# Altium PCB PCB1.PcbDoc (part 1 of 2)
Units mm, origin at the board's own origin, x right, y up, seen from the top; angles counter-clockwise.
Board outline 193 x 120 mm, 2 copper layers (Top Layer, Bottom Layer); 109 components, 163 nets, 596 pads, 0 vias.
Unrouted connection lines stored in the file: 2.
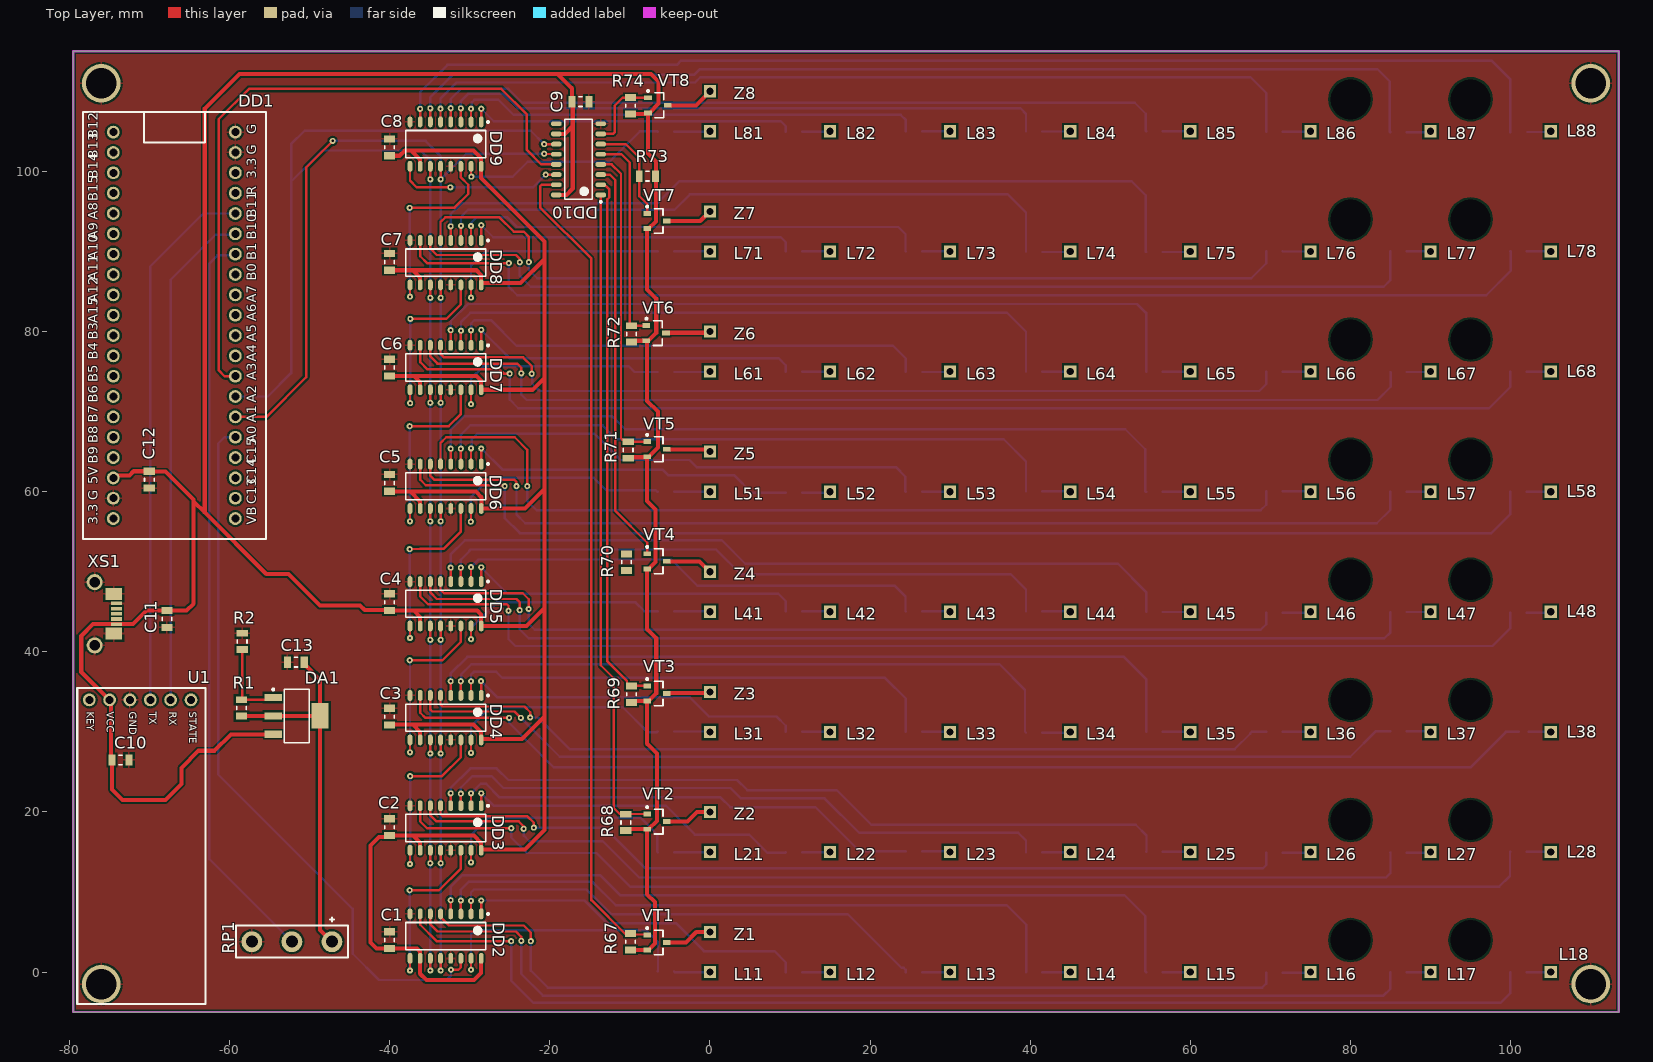
[diagram p0: Top Layer view]
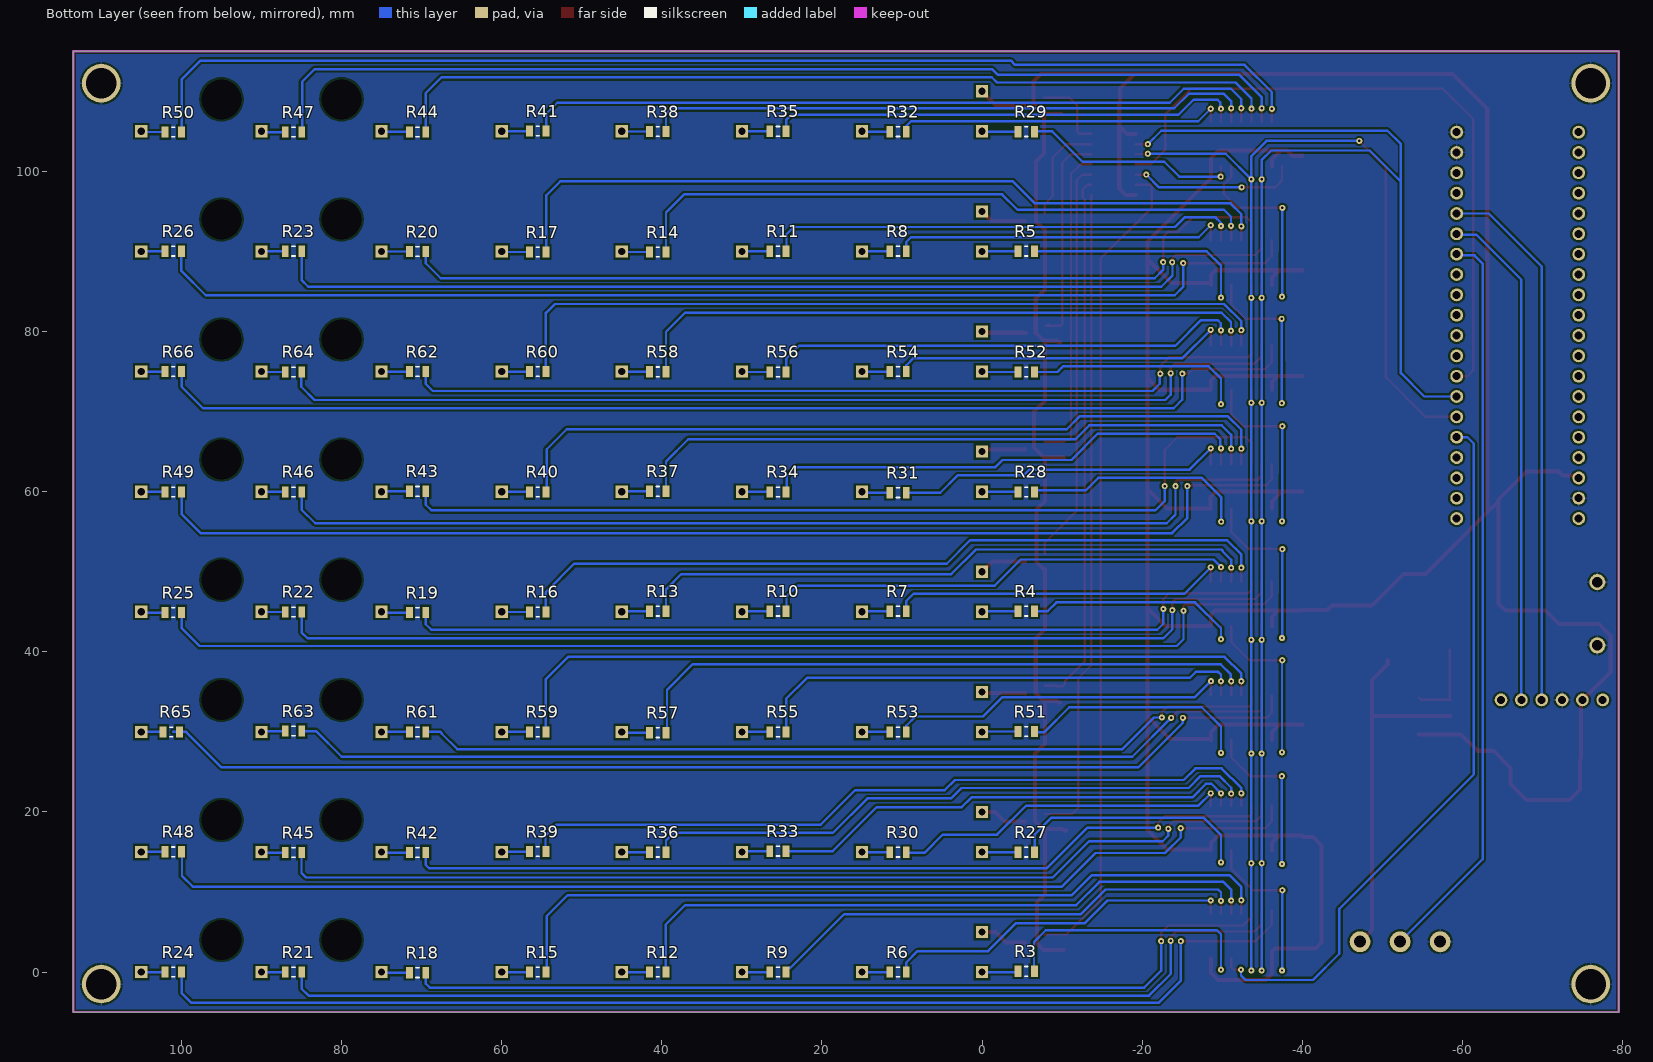
[diagram p1: Bottom Layer view, seen from below]

## Layer stack, top to bottom
Top Solder: solder mask 0.0102, Solder Resist, Dk 3.5
Top Layer: signal copper 0.0356
Dielectric 1: dielectric 0.32, FR-4, Dk 4.8
Bottom Layer: signal copper 0.0356
Bottom Solder: solder mask 0.0102, Solder Resist, Dk 3.5

## Board outline
-79.5,-5 113.5,-5 113.5,115 -79.5,115
cut-out: 113.5,114 113.5,-5 113.5,114

## Design rules (kind name [scope] priority, off if disabled: settings)
Clearance [All] p1: gap=0.254 ignorepadtopadclearanceinfootprint=TRUE
PolygonConnect [All] p1: connectstyle=Relief reliefconductorwidth=0.254 reliefentries=4 polygonreliefangle="90 Angle" airgapwidth=0.254
RoutingVias [All] p1: holewidth=0.8 width=1.27 viastyle="Through Hole" minholewidth=0.8 minwidth=1.27 maxholewidth=0.8 maxwidth=1.27
SolderMaskExpansion [All] p1: expansion=0.102 istentingtop=FALSE
Width Width_1 [InNetClass('allother')] p1: maxlimit=0.3 minlimit=0.3 preferedwidth=0.3
Width [InNetClass('VCC')] p2: maxlimit=0.51 minlimit=0.51 preferedwidth=0.51
30 further rules are at their usual default settings.

## Classes and differential pairs
component class Sheet2: R3 R4 R5 R6 R7 R8 R9 R10 R11 R12 R13 R14 R15 R16 R17 R18 R19 R20 R21 R22 R23 R24 R25 R26 R27 R28 R29 R30 R31 R32 R33 R34 R35 R36 R37 R38 R39 R40 R41 R42 R43 R44 R45 R46 R47 R48 R49 R50 R51 R52 R53 R54 R55 R56 R57 R58 R59 R60 R61 R62 R63 R64 R65 R66
net class allother: NetDA1_3 NetDD1_5 NetDD1_6 NetDD1_7 NetDD1_8 NetDD1_14 NetDD1_15 NetDD1_16 NetDD2_1 NetDD2_2 NetDD2_3 NetDD2_4 NetDD2_5 NetDD2_6 NetDD2_7 NetDD2_9 NetDD2_15 NetDD3_1 NetDD3_2 NetDD3_3 NetDD3_4 NetDD3_5 NetDD3_6 NetDD3_7 NetDD3_9 NetDD3_15 NetDD4_1 NetDD4_2 NetDD4_3 NetDD4_4 NetDD4_5 NetDD4_6 NetDD4_7 NetDD4_9 NetDD4_15 NetDD5_1 NetDD5_2 NetDD5_3 NetDD5_4 NetDD5_5 NetDD5_6 NetDD5_7 NetDD5_9 NetDD5_15 NetDD6_1 NetDD6_2 NetDD6_3 NetDD6_4 NetDD6_5 NetDD6_6 NetDD6_7 NetDD6_9 NetDD6_15 NetDD7_1 NetDD7_2 NetDD7_3 NetDD7_4 NetDD7_5 NetDD7_6 NetDD7_7 NetDD7_9 NetDD7_15 NetDD8_1 NetDD8_2 NetDD8_3 NetDD8_4 NetDD8_5 NetDD8_6 NetDD8_7 NetDD8_9 NetDD8_15 NetDD9_1 NetDD9_2 NetDD9_3 NetDD9_4 NetDD9_5 NetDD9_6 NetDD9_7 NetDD9_9 NetDD9_15 NetDD10_1 NetDD10_2 NetDD10_3 NetDD10_4 NetDD10_5 NetDD10_6 NetDD10_7 NetDD10_15 NetR3_2 NetR4_2 NetR5_2 NetR6_2 NetR7_2 NetR8_2 NetR9_2 NetR10_2 NetR11_2 NetR12_2 NetR13_2 NetR14_2 NetR15_2 NetR16_2 NetR17_2 NetR18_2 NetR19_2 NetR20_2 NetR21_2 NetR22_2 NetR23_2 NetR24_2 NetR25_2 NetR26_2 NetR27_2 NetR28_2 NetR29_2 NetR30_2 NetR31_2 NetR32_2 NetR33_2 NetR34_2 NetR35_2 NetR36_2 NetR37_2 NetR38_2 NetR39_2 NetR40_2 NetR41_2 NetR42_2 NetR43_2 NetR44_2 NetR45_2 NetR46_2 NetR47_2 NetR48_2 NetR49_2 NetR50_2 NetR51_2 NetR52_2 NetR53_2 NetR54_2 NetR55_2 NetR56_2 NetR57_2 NetR58_2 NetR59_2 NetR60_2 NetR61_2 NetR62_2 NetR63_2 NetR64_2 NetR65_2 NetR66_2
net class VCC: +3,3V +5 GND NetVT1_3 NetVT2_3 NetVT3_3 NetVT4_3 NetVT5_3 NetVT6_3 NetVT7_3 NetVT8_3
component class Sheet1: C1 C2 C3 C4 C5 C6 C7 C8 C9 C10 C11 C12 C13 DA1 DD1 DD2 DD3 DD4 DD5 DD6 DD7 DD8 DD9 DD10 R1 R2 R67 R68 R69 R70 R71 R72 R73 R74 RP1 U1 VT1 VT2 VT3 VT4 VT5 VT6 VT7 VT8 XS1

## Components (designator, comment, footprint, x,y, rotation, side; value= is the part's Value field where it differs from the comment)
C1 "0.1uF" CAPC2112X13N -40,4 r270 top
C2 "0.1uF" CAPC2112X13N -40,18.1 r270 top
C3 "0.1uF" CAPC2112X13N -40,31.9 r270 top
C4 "0.1uF" CAPC2112X13N -40,46.2 r270 top
C5 "0.1uF" CAPC2112X13N -40,61.1 r270 top
C6 "0.1uF" CAPC2112X13N -40,75.5 r270 top
C7 "0.1uF" CAPC2112X13N -40,88.7 r270 top
C8 "0.1uF" CAPC2112X13N -40,103 r270 top
C9 "0.1uF" CAPC2112X13N -16.15,108.7 r180 top
C10 "0.1uF" CAPC2112X13N -73.6,26.5 r180 top
C11 "0.1uF" CAPC2112X13N -67.8,44.1 r90 top
C12 "0.1uF" CAPC2112X13N -70,61.5 r90 top
C13 "1u.F" CAPC2112X13N -51.7,38.7 r0 top
DA1 "LM317" SOT230P700X180-4N -51.6,32 r0 top
DD1 "STM32F103C8T6" STM32F103 -59.26,56.64 r90 top
DD2 "74HC595" SOIC127P600X175-16N -33,4.5 r270 top
DD3 "74HC595" SOIC127P600X175-16N -33,18 r270 top
DD4 "74HC595" SOIC127P600X175-16N -33,31.775 r270 top
DD5 "74HC595" SOIC127P600X175-16N -33,46 r270 top
DD6 "74HC595" SOIC127P600X175-16N -33,60.675 r270 top
DD7 "74HC595" SOIC127P600X175-16N -33,75.5 r270 top
DD8 "74HC595" SOIC127P600X175-16N -33,88.6 r270 top
DD9 "74HC595" SOIC127P600X175-16N -33,103.4 r270 top
DD10 "74HC595" SOIC127P600X175-16N -16.4,101.5 r180 top
R1 "240Ом" RESC2113X06N -58.5,33 r90 top
R2 "390 Ом" RESC2113X06N -58.4,41.3 r270 top
R3 "Резистор 0805" RESC2113X06N -5.5,0.1 r0 bottom
R4 "Резистор 0805" RESC2113X06N -5.5,45.075 r0 bottom
R5 "Резистор 0805" RESC2113X06N -5.5,90.025 r0 bottom
R6 "Резистор 0805" RESC2113X06N 10.5,0 r0 bottom
R7 "Резистор 0805" RESC2113X06N 10.5,45.075 r0 bottom
R8 "Резистор 0805" RESC2113X06N 10.5,90.025 r0 bottom
R9 "Резистор 0805" RESC2113X06N 25.5,0 r0 bottom
R10 "Резистор 0805" RESC2113X06N 25.5,45.075 r0 bottom
R11 "Резистор 0805" RESC2113X06N 25.5,90.025 r0 bottom
R12 "Резистор 0805" RESC2113X06N 40.5,0 r0 bottom
R13 "Резистор 0805" RESC2113X06N 40.5,45.075 r0 bottom
R14 "Резистор 0805" RESC2113X06N 40.5,89.925 r0 bottom
R15 "Резистор 0805" RESC2113X06N 55.5,0 r0 bottom
R16 "Резистор 0805" RESC2113X06N 55.5,44.975 r0 bottom
R17 "Резистор 0805" RESC2113X06N 55.5,89.925 r0 bottom
R18 "Резистор 0805" RESC2113X06N 70.5,-0.075 r0 bottom
R19 "Резистор 0805" RESC2113X06N 70.5,44.9 r0 bottom
R20 "Резистор 0805" RESC2113X06N 70.5,90 r0 bottom
R21 "Резистор 0805" RESC2113X06N 86,0 r0 bottom
R22 "Резистор 0805" RESC2113X06N 86,44.975 r0 bottom
R23 "Резистор 0805" RESC2113X06N 86,90.025 r0 bottom
R24 "Резистор 0805" RESC2113X06N 101,0 r0 bottom
R25 "Резистор 0805" RESC2113X06N 101,44.9 r0 bottom
R26 "Резистор 0805" RESC2113X06N 101,90.025 r0 bottom
R27 "Резистор 0805" RESC2113X06N -5.5,14.975 r0 bottom
R28 "Резистор 0805" RESC2113X06N -5.5,59.975 r0 bottom
R29 "Резистор 0805" RESC2113X06N -5.5,104.95 r0 bottom
R30 "Резистор 0805" RESC2113X06N 10.5,14.975 r0 bottom
R31 "Резистор 0805" RESC2113X06N 10.5,59.875 r0 bottom
R32 "Резистор 0805" RESC2113X06N 10.5,104.95 r0 bottom
R33 "Резистор 0805" RESC2113X06N 25.5,15.1 r0 bottom
R34 "Резистор 0805" RESC2113X06N 25.5,59.975 r0 bottom
R35 "Резистор 0805" RESC2113X06N 25.5,105 r0 bottom
R36 "Резистор 0805" RESC2113X06N 40.5,14.975 r0 bottom
R37 "Резистор 0805" RESC2113X06N 40.5,60.05 r0 bottom
R38 "Резистор 0805" RESC2113X06N 40.5,104.975 r0 bottom
R39 "Резистор 0805" RESC2113X06N 55.5,15.05 r0 bottom
R40 "Резистор 0805" RESC2113X06N 55.5,59.975 r0 bottom
R41 "Резистор 0805" RESC2113X06N 55.5,105.025 r0 bottom
R42 "Резистор 0805" RESC2113X06N 70.5,14.925 r0 bottom
R43 "Резистор 0805" RESC2113X06N 70.5,60.05 r0 bottom
R44 "Резистор 0805" RESC2113X06N 70.5,104.925 r0 bottom
R45 "Резистор 0805" RESC2113X06N 86,14.925 r0 bottom
R46 "Резистор 0805" RESC2113X06N 86,59.975 r0 bottom
R47 "Резистор 0805" RESC2113X06N 86,104.9 r0 bottom
R48 "Резистор 0805" RESC2113X06N 101,15.025 r0 bottom
R49 "Резистор 0805" RESC2113X06N 101,59.975 r0 bottom
R50 "Резистор 0805" RESC2113X06N 101,104.9 r0 bottom
R51 "Резистор 0805" RESC2113X06N -5.5,30.05 r0 bottom
R52 "Резистор 0805" RESC2113X06N -5.5,74.95 r0 bottom
R53 "Резистор 0805" RESC2113X06N 10.5,30 r0 bottom
R54 "Резистор 0805" RESC2113X06N 10.5,75 r0 bottom
R55 "Резистор 0805" RESC2113X06N 25.5,30 r0 bottom
R56 "Резистор 0805" RESC2113X06N 25.5,74.95 r0 bottom
R57 "Резистор 0805" RESC2113X06N 40.5,29.9 r0 bottom
R58 "Резистор 0805" RESC2113X06N 40.5,74.975 r0 bottom
R59 "Резистор 0805" RESC2113X06N 55.5,30 r0 bottom
R60 "Резистор 0805" RESC2113X06N 55.5,75 r0 bottom
R61 "Резистор 0805" RESC2113X06N 70.5,30 r0 bottom
R62 "Резистор 0805" RESC2113X06N 70.5,75 r0 bottom
R63 "Резистор 0805" RESC2113X06N 86,30.1 r0 bottom
R64 "Резистор 0805" RESC2113X06N 86,74.95 r0 bottom
R65 "Резистор 0805" RESC2113X06N 101.25,30 r0 bottom
R66 "Резистор 0805" RESC2113X06N 101,75 r0 bottom
R67 "10k" RESC2113X06N -9.9,3.8 r90 top
R68 "10k" RESC2113X06N -10.5,18.7 r90 top
R69 "10k" RESC2113X06N -9.8,34.7 r90 top
R70 "10k" RESC2113X06N -10.4,51.2 r90 top
R71 "10k" RESC2113X06N -10.2,65.2 r90 top
R72 "10k" RESC2113X06N -9.8,79.7 r90 top
R73 "10k" RESC2113X06N -7.8,99.4 r180 top
R74 "10k" RESC2113X06N -9.9,108.2 r90 top
RP1 "Potent" POTENT1 -57.2,3.8 r0 top
U1 "HC-05" HC-05 -77.5,34 r270 top
VT1 "P-channel" SOT95P245X120-3N -6.6,3.7 r0 top
VT2 "P-channel" SOT95P245X120-3N -6.6,18.8 r0 top
VT3 "P-channel" SOT95P245X120-3N -6.6,34.8 r0 top
VT4 "P-channel" SOT95P245X120-3N -6.6,51.3 r0 top
VT5 "P-channel" SOT95P245X120-3N -6.6,65.3 r0 top
VT6 "P-channel" SOT95P245X120-3N -6.7,79.8 r0 top
VT7 "P-channel" SOT95P245X120-3N -6.6,93.8 r0 top
VT8 "P-channel" SOT95P245X120-3N -6.5,108.25 r0 top
XS1 "USB" USB -76.825,40.8 r0 top

## Footprints (in the part's own frame and the unit in brackets; to place one, negate y for a bottom-side part, rotate by r counter-clockwise, add the part's x,y. Pads: shape width x height; smd on the part's side, far side on the other; paste and mask are expansions set on the pad)
CAPC2112X13N [mm] "Chip Capacitor, 2-Leads, Body 2,10x1,25mm, IPC Medium Density"
  rect 0.9x1.4 smd: 1(-1.05,0) 2(1.05,0)
  silkscreen extent -0.2,-0.6 0.2,0.6, body extent -1.1,-0.63 1.1,0.63, height 1.3
HC-05 [mm]
  round 1.6 hole 1: 1(0,12.7) 2(0,10.16) 3(0,7.62) 4(0,5.08) 5(0,2.54) 6(0,0)
  silkscreen extent -1.5,-1.5 38,14.5
POTENT1 [mm]
  round 2.6 hole 1.5: 1(0,0) 2(5,0) 3(10,0)
  silkscreen extent -2,-2 12,3
RESC2113X06N [mm] "Chip Resistor, 2-Leads, Body 2,10x1,30mm, IPC Medium Density"
  rect 0.85x1.4 smd: 1(-1.025,0) 2(1.025,0)
  silkscreen extent -0.2,-0.6 0.2,0.6, body extent -1.1,-0.7 1.1,0.7, height 0.55
SOIC127P600X175-16N [mm] "SOIC, 16-Leads, Body 9,90x4,00mm, Pitch 1,27mm, IPC Medium Density"
  oval 1.35x0.6 smd: 1(-2.775,4.445) 2(-2.775,3.175) 3(-2.775,1.905) 4(-2.775,0.635) 5(-2.775,-0.635) 6(-2.775,-1.905) 7(-2.775,-3.175) 8(-2.775,-4.445) 9(2.775,-4.445) 10(2.775,-3.175) 11(2.775,-1.905) 12(2.775,-0.635) 13(2.775,0.635) 14(2.775,1.905) 15(2.775,3.175) 16(2.775,4.445)
  silkscreen extent -2.9,-5 1.7,5.42, body extent -2.96,-5 2.96,5, height 1.75
SOT95P245X120-3N [mm] "SOT23, 3-Leads, Body 2,92x2,45mm, Pitch 0,95mm, IPC Medium Density"
  rect 0.95x0.6 smd: 1(-1.225,0.95) 2(-1.225,-0.95) 3(1.225,0)
  silkscreen extent -1.35,-1.55 0.75,1.92, body extent -0.75,-1.56 0.75,1.56, height 1.2
SOT230P700X180-4N [mm] "SOT223, 4-Leads, Body 6,50x7,00mm (avg), Pitch 2,30mm, IPC Medium Density"
  rect 2.15x0.9 smd: 1(-2.925,-2.3) 2(-2.925,0) 3(-2.925,2.3)
  rect 2.15x3.2 smd: 2(2.925,0)
  silkscreen extent -3.05,-3.35 1.55,3.42, body extent -3.5,-3.35 3.5,3.35, height 1.8
STM32F103 [mm]
  round 1.6 hole 1: 1(0,0) 2(2.54,0) 3(5.08,0) 4(7.62,0) 5(10.16,0) 6(12.7,0) 7(15.24,0) 8(17.78,0) 9(20.32,0) 10(22.86,0) 11(25.4,0) 12(27.94,0) 13(30.48,0) 14(33.02,0) 15(35.56,0) 16(38.1,0) 17(40.64,0) 18(43.18,0) 19(45.72,0) 20(48.26,0) 21(0,15.24) 22(2.54,15.24) 23(5.08,15.24) 24(7.62,15.24) 25(10.16,15.24) 26(12.7,15.24) 27(15.24,15.24) 28(17.78,15.24) 29(20.32,15.24) 30(22.86,15.24) 31(25.4,15.24) 32(27.94,15.24) 33(30.48,15.24) 34(33.02,15.24) 35(35.56,15.24) 36(38.1,15.24) 37(40.64,15.24) 38(43.18,15.24) 39(45.72,15.24) 40(48.26,15.24)
  silkscreen extent -2.54,-3.81 50.8,19.05
USB [mm]
  rect 1.38x0.45 smd: 1(2.725,2.65) 2(2.725,3.3) 3(2.725,3.95) 4(2.725,4.6) 5(2.725,5.25)
  round 2 hole 1.3 unplated: 5(0,0) 5(0,7.9)
  rect 2.1x1.475 smd: 5(2.375,1.475) 5(2.375,6.425)

## Part data
DA1: "Регулируемый стабилизатор напряжения"
DD2 DD3 DD4 DD5 DD6 DD7 DD8 DD9 DD10: "Сдвиговый регистр"
R67 R68 R69 R70 R71 R72 R73 R74: library part "Резистор 0805"
RP1: "Переменный резистор 10кОм"
VT1 VT2 VT3 VT4 VT5 VT6 VT7 VT8: "Транзистор MOSFET N-канальный"

## Free pads (board coordinates)
  rect 1.524x1.524 hole 0.9: 1(0,0) 2(15,0) 3(30,0) 4(45,0) 5(60,0) 6(75,0) 7(90,0) 8(105,0) 9(0,15) 10(15,15) 11(30,15) 12(45,15) 13(60,15) 14(75,15) 15(90,15) 16(105,15) 17(0,30) 18(15,30) 19(30,30) 20(45,30) 21(60,30) 22(75,30) 23(90,30) 24(105,30) 25(0,45) 26(15,45) 27(30,45) 28(45,45) 29(60,45) 30(75,45) 31(90,45) 32(105,45) 33(0,60) 34(15,60) 35(30,60) 36(45,60) 37(60,60) 38(75,60) 39(90,60) 40(105,60) 41(0,75) 42(15,75) 43(30,75) 44(45,75) 45(60,75) 46(75,75) 47(90,75) 48(105,75) 49(0,90) 50(15,90) 51(30,90) 52(45,90) 53(60,90) 54(75,89.975) 55(90,90) 56(105,90) 57(0,105) 58(15,105) 59(30,105) 60(45,105) 61(60,105) 62(75,105) 63(90,105) 64(105,105) 65(0,5) 66(0,20) 67(0,35) 68(0,50) 69(0,65) 70(0,80) 71(0,95) 72(0,110)
  round 4.8 hole 3.8: 94(-76,-1.5)
  round 4.8 hole 3.8 unplated: 94(-76,111) 94(110,-1.5) 94(110,111)
  round 0.762 hole 0.3: 95(-47.1,103.8) 95(-37.5,10.225) 95(-37.5,52.825) 95(-37.5,68.175) 95(-37.5,95.45) 95(-37.475,38.95) 95(-37.45,0.2) 95(-37.45,13.5) 95(-37.45,41.725) 95(-37.45,56.3) 95(-37.445,27.45) 95(-37.445,84.355) 95(-37.425,24.475) 95(-37.425,71.05) 95(-37.4,81.575) 95(-36.175,107.8) 95(-34.905,107.87) 95(-34.9,0.2) 95(-34.9,13.6) 95(-34.9,27.3) 95(-34.9,41.5) 95(-34.9,56.3) 95(-34.9,71.1) 95(-34.9,84.2) 95(-34.9,99) 95(-33.635,107.84) 95(-33.625,0.2) 95(-33.625,13.6) 95(-33.625,27.3) 95(-33.625,41.5) 95(-33.625,56.3) 95(-33.625,71.1) 95(-33.625,84.2) 95(-33.625,99) 95(-32.4,98) 95(-32.375,8.975) 95(-32.375,22.325) 95(-32.375,36.325) 95(-32.375,65.375) 95(-32.365,50.515) 95(-32.365,80.175) 95(-32.365,93.135) 95(-32.365,107.885) 95(-32.325,0.3) 95(-31.1,22.3) 95(-31.1,36.325) 95(-31.095,8.945) 95(-31.095,50.505) 95(-31.095,65.37) 95(-31.095,107.87) 95(-31.075,80.1) 95(-31.075,93.2) 95(-29.85,56.25) 95(-29.825,0.3) 95(-29.825,8.9) 95(-29.825,13.7) 95(-29.825,22.325) 95(-29.825,27.375) 95(-29.825,36.325) 95(-29.825,41.575) 95(-29.825,50.575) 95(-29.825,65.4) 95(-29.825,70.925) 95(-29.825,80.15) 95(-29.825,84.225) 95(-29.825,93.175) 95(-29.825,107.825) 95(-29.787,99.338) 95(-28.585,36.347) 95(-28.555,8.945) 95(-28.555,65.395) 95(-28.552,107.822) 95(-28.55,22.325) 95(-28.55,50.55) 95(-28.55,80.2) 95(-28.55,93.275) 95(-25.625,60.7) 95(-25.15,45.125) 95(-25.1,88.55) 95(-25.075,31.75) 95(-25,74.75) 95(-24.825,3.875) 95(-24.8,17.975) 95(-24.15,60.7) 95(-23.75,45.2) 95(-23.725,88.65) 95(-23.6,31.75) 95(-23.55,3.9) 95(-23.55,74.775) 95(-23.25,17.9) 95(-22.8,60.7) 95(-22.625,45.35) 95(-22.6,88.675) 95(-22.45,31.8) 95(-22.35,3.875) 95(-22.25,74.725) 95(-21.975,18.05) 95(-20.7,102.2) 95(-20.7,103.4) 95(-20.5,99.6)
  round 0 hole 5 unplated: 97(80,4) 97(80,19) 97(80,34) 97(80,49) 97(80,64) 97(80,79) 97(80,94) 97(80,109) 97(95,4) 97(95,19) 97(95,34) 97(95,49) 97(95,64) 97(95,79) 97(95,94) 97(95,109)

## Nets (pads, with @x,y where several pads share a name; then routed paths per layer and width w, separated by ;. In a path a pad name is that pad's centre, name@x,y a point inside that pad or via, vN(x,y) a via of type N, cw(c..) or ccw(c..) an arc to the next point about the centre after c; other vN are vias at no path point)
+3,3V: C13.2 DA1.2 R1.1 RP1.3 | length 46.4
  Top Layer w0.51: R1.1@-58.5,31.975 -58.488,31.988 -54.538,31.988 DA1.2@-54.525,32 DA1.2@-48.675,32 ; C13.2@-50.65,38.95 C13.2@-50.65,38.7 -50.65,38.45 -48.675,36.475 DA1.2@-48.675,32 ; RP1.3@-47.2,3.8 -48.675,5.275 DA1.2@-48.675,32
+5: C1.2 C2.2 C3.2 C4.2 C5.2 C6.2 C7.2 C8.2 C9.2 C10.2 C11.2 C12.2 DA1.1 DD1.23 DD2.10 DD2.16 DD3.10 DD3.16 DD4.10 DD4.16 DD5.10 DD5.16 DD6.10 DD6.16 DD7.10 DD7.16 DD8.10 DD8.16 DD9.10 DD9.16 DD10.10 DD10.16 R67.1 R68.1 R69.1 R70.1 R71.1 R72.1 R73.1 R74.1 U1.5 VT1.2 VT2.2 VT3.2 VT4.2 VT5.2 VT6.2 VT7.2 VT8.2 XS1.1 | length 657.1
  Top Layer w0.51: DD1.23@-74.54,62.2 -74.34,62 -72.5,62 -71.95,62.55 C12.2@-70,62.55 -69.95,62.5 -68,62.5 -64.5,59 -64.5,58.8 ; DA1.1@-54.525,29.7 -59.8,29.7 -61.85,27.65 -63.85,27.65 -66,25.5 -66,23.5 -68,21.5 -73.351,21.5 -74.65,22.799 C10.2@-74.65,26.5 -74.805,26.655 -74.805,33.845 U1.5@-74.96,34 -75,34 -78.5,37.5 -78.5,42 -77.05,43.45 XS1.1@-74.1,43.45 -72.05,43.45 -70.35,45.15 C11.2@-67.8,45.15 -65.35,45.15 -64.5,46 -64.5,58.8 ; C3.2@-40,30.85 -39.95,30.9 -37.1,30.9 ; C5.2@-40,60 -37.4,60 ; C6.2@-40,74.45 -36.95,74.45 ; C7.2@-40,87.65 -37.05,87.65 ; C8.2@-40,101.95 -38.75,101.95 -38.1,102.6 -37.3,102.6 ; DD3.10@-36.175,15.225 -36.175,16.175 -37.05,17.05 ; DD4.10@-36.175,29 -36.175,29.975 -37.1,30.9 ; DD5.10@-36.175,43.225 -36.175,44.375 -36.95,45.15 ; DD6.10@-36.175,57.9 -36.175,58.775 -37.4,60 ; DD7.10@-36.175,72.725 -36.175,73.675 -36.95,74.45 ; DD8.10@-36.175,85.825 -36.175,86.775 -37.05,87.65 ; DD9.10@-36.175,100.625 -36.192,100.642 -36.192,101.492 -37.3,102.6 ; DD2.16@-28.555,1.725 -28.555,-0.105 -29.45,-1 -35.4,-1 -36.2,-0.2 -36.2,0.3 -36.175,0.325 DD2.10@-36.175,1.725 -36.175,2.575 -36.55,2.95 C1.2@-40,2.95 -41.65,2.95 -42.4,3.7 -42.4,15.8 -41.3,16.9 -40.15,16.9 C2.2@-40,17.05 -37.05,17.05 ; DD8.16@-28.555,85.825 DD8.16@-28.555,86.008 ; DD10.16@-19.175,97.055 -19.17,97.05 -17.925,97.05 -17.125,97.85 -17.125,105.675 ; DD10.10@-19.175,104.675 -19.158,104.692 -18.108,104.692 -17.125,105.675 ; R68.1@-10.5,17.675 -10.225,17.675 -10.05,17.85 VT2.2@-7.825,17.85 ; R71.1@-10.2,64.175 -10.075,64.3 -8.05,64.3 -8.045,64.305 -7.87,64.305 VT5.2@-7.825,64.35 ; R67.1@-10.175,2.775 R67.1@-9.9,2.775 -9.888,2.763 -7.837,2.763 VT1.2@-7.825,2.75 -7.65,2.75 -6.841,3.559 -6.841,8.741 -7.825,9.725 VT2.2@-7.825,17.85 ; R74.1@-9.9,107.175 -8.025,107.175 -7.9,107.3 VT8.2@-7.725,107.3 ; R69.1@-9.8,33.675 -9.525,33.675 -9.35,33.85 VT3.2@-7.825,33.85 ; R72.1@-9.8,78.675 -9.525,78.675 -9.35,78.85 VT6.2@-7.925,78.85 ; -64.5,58.8 -63.075,57.375 ; -63.075,57.375 -55.4,49.7 -52.597,49.7 -48.675,45.778 -43.678,45.778 -43.1,45.2 -40.05,45.2 C4.2@-40,45.15 -36.95,45.15 ; -63.075,57.375 -63.075,107.825 -58.725,112.175 -19,112.175 ; -37.4,60 -29.2,60 -28.5,59.3 -28.538,59.262 -28.538,57.917 DD6.16@-28.555,57.9 -23.1,57.9 -20.65,60.35 ; -37.3,102.6 -29.5,102.6 -28.555,101.655 DD9.16@-28.555,100.625 -28.555,99.155 -20.65,91.25 -20.65,89.025 ; -37.1,30.9 -29.5,30.9 -28.572,29.972 -28.572,29.017 DD4.16@-28.555,29 -28.555,29.058 -28.513,29.1 -23.45,29.1 -20.65,31.9 ; -37.05,17.05 -29.45,17.05 -28.555,16.155 -28.555,15.258 -28.513,15.3 -23.1,15.3 -20.65,17.75 -20.65,31.9 ; -37.05,87.65 -29.15,87.65 -28.555,87.055 DD8.16@-28.555,86.008 ; -36.95,45.15 -29.05,45.15 -28.555,44.655 DD5.16@-28.555,43.225 -22.875,43.225 -20.65,45.45 ; -36.95,74.45 -29.15,74.45 -28.572,73.872 -28.572,72.742 DD7.16@-28.555,72.725 -22.125,72.725 -20.65,74.2 ; DD8.16@-28.555,86.008 -28.513,86.05 -23.625,86.05 -20.65,89.025 ; -20.65,31.9 -20.65,45.45 ; -20.65,45.45 -20.65,47.775 -20.65,60.35 ; -20.65,60.35 -20.65,74.2 ; -20.65,74.2 -20.65,85.35 -20.65,89.025 ; -19,112.175 -7.375,112.175 -6.4,111.2 -6.4,108.45 -7.55,107.3 VT8.2@-7.725,107.3 ; -19,112.175 -17.2,110.375 C9.2@-17.2,108.7 -17.125,108.625 -17.125,105.675 ; VT2.2@-7.825,17.85 -7.65,17.85 -6.6,18.9 -6.6,27.3 -7.825,28.525 VT3.2@-7.825,33.85 ; VT3.2@-7.825,33.85 -7.65,33.85 -6.7,34.8 -6.7,41.7 -7.825,42.825 VT4.2@-7.825,50.35 -7.65,50.35 -6.8,51.2 -6.8,57.8 -7.825,58.825 VT5.2@-7.825,64.35 ; VT5.2@-7.825,64.35 -7.65,64.35 -6.5,65.5 -6.5,70 -7.825,71.325 -7.825,78.85 -7.65,78.85 -6.7,79.8 -6.7,84.1 -7.825,85.225 VT7.2@-7.825,92.85 -7.65,92.85 -6.75,93.75 -6.75,101.25 -7.725,102.225 VT8.2@-7.725,107.3
GND: C1.1 C2.1 C3.1 C4.1 C5.1 C6.1 C7.1 C8.1 C9.1 C10.1 C11.1 C12.1 C13.1 DD1.19 DD1.20 DD1.22 DD2.8 DD2.13 DD3.8 DD3.13 DD4.8 DD4.13 DD5.8 DD5.13 DD6.8 DD6.13 DD7.8 DD7.13 DD8.8 DD8.13 DD9.8 DD9.13 DD10.8 pad.94 R2.1 RP1.1 U1.4 XS1.5
NetDA1_3: DA1.3 R1.2 R2.2 | length 10.4
  Top Layer w0.3: R2.2@-58.4,40.275 -58.4,34.125 R1.2@-58.5,34.025 -54.8,34.025 DA1.3@-54.525,34.3
NetDD1_5: DD1.5 DD2.14 pad.95@-32.325,0.3 | length 90.2
  Top Layer w0.3: pad.95@-32.325,0.3 -31.4,0.3 -31.097,0.603 -31.097,1.722 DD2.14@-31.095,1.725
  Bottom Layer w0.3: DD1.5@-59.26,66.8 -60.6,66.8 -61.4,66 -61.4,24.7 -44.6,7.9 -44.6,2.3 -41.325,-0.975 -32.9,-0.975 -32.325,-0.4 pad.95@-32.325,0.3
NetDD1_6: DD1.6 DD2.12 DD3.12 DD4.12 DD5.12 DD6.12 DD7.12 DD8.12 DD9.12 DD10.12 pad.95@-20.7,102.2 pad.95@-33.625,0.2 pad.95@-33.625,13.6 pad.95@-33.625,27.3 pad.95@-33.625,41.5 pad.95@-33.625,56.3 pad.95@-33.625,71.1 pad.95@-33.625,84.2 pad.95@-33.625,99 pad.95@-47.1,103.8 | length 186.6
  Top Layer w0.3: DD1.6@-59.26,69.34 -55.36,69.34 -50.4,74.3 -50.4,100.5 pad.95@-47.1,103.8 ; DD2.12@-33.635,1.725 -33.63,1.72 -33.63,0.205 pad.95@-33.625,0.2 ; DD3.12@-33.635,15.225 -33.63,15.22 -33.63,13.605 pad.95@-33.625,13.6 ; DD4.12@-33.635,29 -33.63,28.995 -33.63,27.305 pad.95@-33.625,27.3 ; DD5.12@-33.635,43.225 -33.63,43.22 -33.63,41.505 pad.95@-33.625,41.5 ; DD6.12@-33.635,57.9 -33.63,57.895 -33.63,56.305 pad.95@-33.625,56.3 ; DD7.12@-33.635,72.725 -33.63,72.72 -33.63,71.105 pad.95@-33.625,71.1 ; DD8.12@-33.635,85.825 -33.63,85.82 -33.63,84.205 pad.95@-33.625,84.2 ; DD9.12@-33.635,100.625 -33.63,100.62 -33.63,99.005 pad.95@-33.625,99 ; pad.95@-20.7,102.2 -20.668,102.167 -19.207,102.167 DD10.12@-19.175,102.135
  Bottom Layer w0.3: pad.95@-47.1,103.8 -35.5,103.8 -33.625,101.925 pad.95@-33.625,99 ; pad.95@-33.625,0.2 pad.95@-33.625,13.6 pad.95@-33.625,27.3 pad.95@-33.625,41.5 pad.95@-33.625,56.3 pad.95@-33.625,71.1 pad.95@-33.625,84.2 pad.95@-33.625,99 ; pad.95@-20.7,102.2 -30.425,102.2 pad.95@-33.625,99
NetDD1_7: DD1.7 DD2.11 DD3.11 DD4.11 DD5.11 DD6.11 DD7.11 DD8.11 DD9.11 DD10.11 pad.95@-20.7,103.4 pad.95@-34.9,0.2 pad.95@-34.9,13.6 pad.95@-34.9,27.3 pad.95@-34.9,41.5 pad.95@-34.9,56.3 pad.95@-34.9,71.1 pad.95@-34.9,84.2 pad.95@-34.9,99 | length 205.1
  Top Layer w0.3: DD2.11@-34.905,1.725 -34.902,1.722 -34.902,0.202 pad.95@-34.9,0.2 ; DD3.11@-34.905,15.225 -34.902,15.222 -34.902,13.603 pad.95@-34.9,13.6 ; DD4.11@-34.905,29 -34.902,28.997 -34.902,27.302 pad.95@-34.9,27.3 ; DD5.11@-34.905,43.225 -34.902,43.222 -34.902,41.503 pad.95@-34.9,41.5 ; DD6.11@-34.905,57.9 -34.902,57.898 -34.902,56.302 pad.95@-34.9,56.3 ; DD7.11@-34.905,72.725 -34.902,72.722 -34.902,71.102 pad.95@-34.9,71.1 ; DD8.11@-34.905,85.825 -34.902,85.822 -34.902,84.202 pad.95@-34.9,84.2 ; DD9.11@-34.905,100.625 -34.902,100.622 -34.902,99.002 pad.95@-34.9,99 ; pad.95@-20.7,103.4 -20.698,103.402 -19.178,103.402 DD10.11@-19.175,103.405
  Bottom Layer w0.3: DD1.7@-59.26,71.88 -55.22,71.88 -52.3,74.8 -52.3,98.7 ; pad.95@-34.9,0.2 pad.95@-34.9,13.6 pad.95@-34.9,27.3 pad.95@-34.9,41.5 pad.95@-34.9,56.3 pad.95@-34.9,71.1 pad.95@-34.9,84.2 pad.95@-34.9,99 -34.9,101.4 -36.1,102.6 -48.4,102.6 -52.3,98.7 ; pad.95@-20.7,103.4 -22.375,105.075 -50.625,105.075 -52.3,103.4 -52.3,98.7
NetDD1_8: DD1.8 DD10.13 | length 84
  Top Layer w0.3: DD1.8@-59.26,74.42 -60.595,74.42 -61.35,75.175 -61.35,106.5 -57.55,110.3 -26.05,110.3 -22.85,107.1 -22.85,102.675 -21.05,100.875 -19.185,100.875 DD10.13@-19.175,100.865
NetDD1_14: DD1.14 RP1.2 | length 92.7
  Bottom Layer w0.3: DD1.14@-59.26,89.66 -59.42,89.5 -61.5,89.5 -62.5,88.5 -62.5,14.1 RP1.2@-52.2,3.8
NetDD1_15: DD1.15 U1.2 | length 62.9
  Bottom Layer w0.3: U1.2@-67.34,34 -67.34,86.46 -61.7,92.1 -59.36,92.1 DD1.15@-59.26,92.2
NetDD1_16: DD1.16 U1.3 | length 67.5
  Bottom Layer w0.3: U1.3@-69.88,34 -69.88,88.12 -63.26,94.74 DD1.16@-59.26,94.74
NetDD2_1: DD2.1 pad.95@-28.555,8.945 R6.1 | length 44.1
  Top Layer w0.3: DD2.1@-28.555,7.275 pad.95@-28.555,8.945 pad.95@-28.55,8.95
  Bottom Layer w0.3: pad.95@-28.555,8.945 -15.645,8.945 -12.825,6.125 -4.25,6.125 -0.75,2.625 8.05,2.625 9.475,1.2 R6.1@9.475,0
NetDD2_2: DD2.2 pad.95@-29.825,8.9 R9.1 | length 61.6
  Top Layer w0.3: DD2.2@-29.825,7.275 pad.95@-29.825,8.9
  Bottom Layer w0.3: pad.95@-29.825,8.9 -29.825,9.975 -29.475,10.325 -15.4,10.325 -12.325,7.25 17.225,7.25 23.925,0.55 24.2,0.55 24.475,0.275 R9.1@24.475,0
NetDD2_3: DD2.3 pad.95@-31.095,8.945 R12.1 | length 82.2
  Top Layer w0.3: pad.95@-31.1,8.95 pad.95@-31.095,8.945 DD2.3@-31.095,7.275
  Bottom Layer w0.3: pad.95@-31.095,8.945 -31.095,10.305 -30.125,11.275 -14.65,11.275 -11.75,8.375 37.075,8.375 39.5,5.95 39.5,0.025 R12.1@39.475,0
NetDD2_4: DD2.4 pad.95@-32.375,8.975 R15.1 | length 99.9
  Top Layer w0.3: pad.95@-32.375,8.975 -32.365,8.965 DD2.4@-32.365,7.275
  Bottom Layer w0.3: pad.95@-32.375,8.975 -32.375,10.625 -30.875,12.125 -13.725,12.125 -11.225,9.625 51.75,9.625 54.375,7 54.375,0.1 R15.1@54.475,0
NetDD2_5: DD2.5 pad.95@-22.35,3.875 R18.1 | length 111.5
  Top Layer w0.3: DD2.5@-33.635,7.275 -33.635,6.9 -32.56,5.825 -23.25,5.825 -22.367,4.942 pad.95@-22.35,3.875
  Bottom Layer w0.3: pad.95@-22.35,3.875 -22.35,0.175 -20.25,-1.925 68.975,-1.925 69.475,-1.425 R18.1@69.475,-0.075
NetDD2_6: DD2.6 pad.95@-23.55,3.9 R21.1 | length 130
  Top Layer w0.3: DD2.6@-34.905,7.275 -34.905,5.955 -34.025,5.075 -24.225,5.075 -23.55,4.4 pad.95@-23.55,3.9
  Bottom Layer w0.3: pad.95@-23.55,3.9 -23.55,-0.225 -20.85,-2.925 84.125,-2.925 84.975,-2.075 R21.1@84.975,0
NetDD2_7: DD2.7 pad.95@-24.825,3.875 R24.1 | length 147.9
  Top Layer w0.3: DD2.7@-36.175,7.65 DD2.7@-36.175,7.275 -36.175,5.925 -34.125,3.875 pad.95@-24.825,3.875
  Bottom Layer w0.3: pad.95@-24.825,3.875 -24.825,-1.05 -22.075,-3.8 98.775,-3.8 99.975,-2.6 R24.1@99.975,0
NetDD2_9: DD2.9 DD3.14 pad.95@-37.5,10.225 pad.95@-37.45,0.2 | length 21.4
  Top Layer w0.3: pad.95@-37.5,10.225 -33.825,10.225 -31.095,12.955 DD3.14@-31.095,15.225 ; pad.95@-37.45,0.2 -37.45,0.3 -37.445,0.305 DD2.9@-37.445,1.725
  Bottom Layer w0.3: pad.95@-37.5,10.225 -37.5,0.25 pad.95@-37.45,0.2
NetDD2_15: DD2.15 pad.95@-29.825,0.3 R3.1 | length 33.7
  Top Layer w0.3: pad.95@-29.825,0.3 DD2.15@-29.825,1.725
  Bottom Layer w0.3: pad.95@-29.825,0.3 -29.825,4.725 -29.325,5.225 -7.95,5.225 -6.475,3.75 -6.475,0.15 R3.1@-6.525,0.1
NetDD3_1: DD3.1 pad.95@-28.55,22.325 R30.1 | length 42.8
  Top Layer w0.3: DD3.1@-28.555,20.775 -28.555,22.37 pad.95@-28.525,22.4
  Bottom Layer w0.3: pad.95@-28.55,22.325 -27.025,20.8 -5.5,20.8 -1.875,17.175 4.925,17.175 7.2,14.9 9.4,14.9 R30.1@9.475,14.975
NetDD3_2: DD3.2 pad.95@-29.825,22.325 R33.1 | length 59.8
  Top Layer w0.3: DD3.2@-29.825,20.775 pad.95@-29.825,22.325
  Bottom Layer w0.3: pad.95@-29.825,22.325 -28.632,23.518 -27.943,23.518 -26.25,21.825 1.325,21.825 2.564,20.586 13.189,20.586 18.675,15.1 R33.1@24.475,15.1
NetDD3_3: DD3.3 pad.95@-31.1,22.3 R36.1 | length 78.2
  Top Layer w0.3: pad.95@-31.1,22.3 -31.095,22.195 DD3.3@-31.095,20.775
  Bottom Layer w0.3: pad.95@-31.1,22.3 -31.1,23.025 -29.65,24.475 -27.275,24.475 -25.8,23 2.575,23 3.875,21.7 14.325,21.7 18.625,17.4 38.5,17.4 39.475,16.425 R36.1@39.475,14.975
NetDD3_4: DD3.4 pad.95@-32.375,22.325 R39.1 | length 95.6
  Top Layer w0.3: pad.95@-32.375,22.325 -32.365,22.14 DD3.4@-32.365,20.775
  Bottom Layer w0.3: pad.95@-32.375,22.325 -32.375,22.975 -29.9,25.45 -26.625,25.45 -25.175,24 3.4,24 4.675,22.725 15.85,22.725 20.175,18.4 53.175,18.4 54.525,17.05 54.525,15.1 R39.1@54.475,15.05
NetDD3_5: DD3.5 pad.95@-21.975,18.05 R42.1 | length 109
  Top Layer w0.3: DD3.5@-33.635,20.775 -33.635,19.735 -33.35,19.45 -22.775,19.45 -21.975,18.65 pad.95@-21.975,18.05
  Bottom Layer w0.3: pad.95@-21.975,18.05 -13.15,18.05 -8.05,12.95 69.05,12.95 69.475,13.375 R42.1@69.475,14.925
NetDD3_6: DD3.6 pad.95@-23.25,17.9 R45.1 | length 127.8
  Top Layer w0.3: DD3.6@-34.905,20.775 -34.905,19.58 -34.15,18.825 -23.875,18.825 -23.25,18.2 pad.95@-23.25,17.9
  Bottom Layer w0.3: pad.95@-23.25,17.9 -23.25,17.05 -22.55,16.35 -13.35,16.35 -8.825,11.825 84.425,11.825 85,12.4 85,14.9 R45.1@84.975,14.925
NetDD3_7: DD3.7 pad.95@-24.8,17.975 R48.1 | length 145.7
  Top Layer w0.3: DD3.7@-36.175,20.775 -36.175,18.825 -35.325,17.975 pad.95@-24.8,17.975
  Bottom Layer w0.3: pad.95@-24.8,17.975 -24.8,16.825 -22.85,14.875 -14.175,14.875 -9.975,10.675 98.575,10.675 99.925,12.025 99.925,14.975 R48.1@99.975,15.025
NetDD3_9: DD3.9 DD4.14 pad.95@-37.45,13.5 pad.95@-37.425,24.475 | length 22.2
  Top Layer w0.3: pad.95@-37.45,13.5 -37.445,13.505 DD3.9@-37.445,15.225 ; pad.95@-37.425,24.475 -36.175,24.475 -33.45,24.475 -31.095,26.83 DD4.14@-31.095,29
  Bottom Layer w0.3: pad.95@-37.45,13.5 -37.437,13.513 -37.437,24.188 -37.425,24.2 pad.95@-37.425,24.475
NetDD3_15: DD3.15 pad.95@-29.825,13.7 R27.1 | length 32.2
  Top Layer w0.3: pad.95@-29.825,13.7 DD3.15@-29.825,15.225
  Bottom Layer w0.3: pad.95@-29.825,13.7 -29.825,17.125 -27.65,19.3 -8.675,19.3 -6.575,17.2 -6.575,15.025 R27.1@-6.525,14.975
NetDD4_1: DD4.1 pad.95@-28.585,36.347 R53.1 | length 42.9
  Top Layer w0.3: DD4.1@-28.555,34.55 -28.555,36.32 pad.95@-28.55,36.325
  Bottom Layer w0.3: pad.95@-28.585,36.347 -26.588,34.35 -2.525,34.35 -0.1,31.925 8.325,31.925 9.475,30.775 R53.1@9.475,30
NetDD4_2: DD4.2 pad.95@-29.825,36.325 R55.1 | length 62.6
  Top Layer w0.3: DD4.2@-29.825,34.55 pad.95@-29.825,36.325
  Bottom Layer w0.3: pad.95@-29.825,36.325 -29.825,37.15 -29.475,37.5 -26.675,37.5 -25.925,36.75 21.875,36.75 24.475,34.15 R55.1@24.475,30
NetDD4_3: DD4.3 pad.95@-31.1,36.325 R57.1 | length 80.3
  Top Layer w0.3: pad.95@-31.1,36.325 -31.095,36.22 DD4.3@-31.095,34.55
  Bottom Layer w0.3: pad.95@-31.1,36.325 -31.069,36.356 -31.069,37.156 -29.775,38.45 36.15,38.45 39.35,35.25 39.35,30.025 R57.1@39.475,29.9